# Altium PCB LED灯带-2835-30B-全限流-加定位点.PcbDoc (part 3 of 3)
Units mm, origin at the board's own origin, x right, y up, seen from the top; angles counter-clockwise.
Board outline 500 x 8 mm, 2 copper layers (Top Layer, Bottom Layer); 91 components, 0 nets, 184 pads, 0 vias.
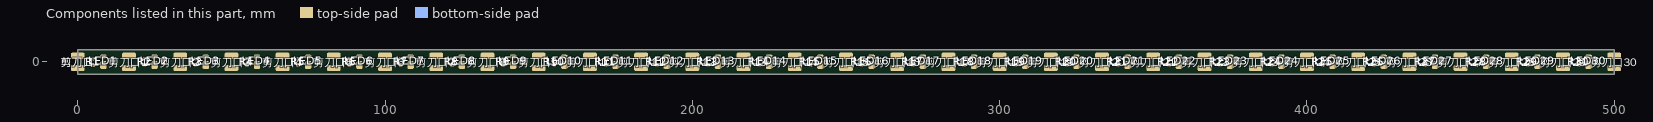
[diagram p3: the components of this part, seen from the top]

## Other copper (continued)
Top Layer: (continued)
  rectangle: 338.794,0.381 339.683,1.524
  rectangle: 339.122,0.762 339.302,1.778
  rectangle: 339.302,0.762 339.429,1.778
  rectangle: 333.333,0.635 336.762,3.741
  rectangle: 333.333,-3.683 337.651,-0.635
  rectangle: 346.795,-3.683 350.097,-0.635
  rectangle: 347.176,0.635 350.097,3.741
  rectangle: 340.318,-2.286 341.08,0.318
  rectangle: 340.445,-2.413 343.489,0.508
  region: 340.673,1.497 340.318,1.143 340.445,1.016 340.8,1.37
  rectangle: 340.445,1.016 343.747,2.286
  rectangle: 340.43,1.031 343.493,2.921
  region: 340.445,-0.762 340.953,-0.254 339.556,1.143 339.048,0.635
  rectangle: 337.524,0.508 338.006,1.651
  region: 337.783,1.392 337.91,1.519 337.651,1.778 337.524,1.651
  region: 338.006,0.989 337.524,0.508 337.651,0.381 338.133,0.862
  region: 337.556,-0.994 337.91,-0.64 337.651,-0.381 337.297,-0.735
  rectangle: 337.651,0.508 339.302,1.778
  rectangle: 337.651,0.381 339.122,0.762
  rectangle: 337.651,-3.048 339.175,-0.381
  region: 357.344,2.064 356.99,2.418 356.731,2.159 357.085,1.805
  rectangle: 356.985,1.143 357.366,2.54
  rectangle: 353.048,0.889 353.683,2.667
  region: 356.255,-3.153 356.609,-2.799 356.35,-2.54 355.996,-2.894
  rectangle: 355.842,-3.048 360.827,-2.767
  rectangle: 360.922,-3.175 361.557,-0.889
  region: 360.827,-3.026 361.181,-2.672 360.922,-2.413 360.568,-2.767
  rectangle: 350.259,-3.683 361.303,-2.794
  rectangle: 361.181,-3.683 366.764,-0.63
  region: 361.535,-0.984 361.181,-0.63 360.922,-0.889 361.276,-1.243
  region: 355.996,-1.243 356.35,-0.889 355.842,-0.381 355.488,-0.735
  region: 354.223,-0.994 354.577,-0.64 354.318,-0.381 353.964,-0.735
  rectangle: 350.259,-3.683 356.35,-0.889
  region: 353.329,2.386 353.683,2.032 353.942,2.291 353.588,2.645
  region: 360.097,1.333 360.795,0.635 361.054,0.894 360.355,1.592
  region: 353.07,0.984 353.424,0.63 353.683,0.889 353.329,1.243
  rectangle: 357.112,1.016 360.795,3.741
  rectangle: 360.795,0.635 366.637,3.741
  rectangle: 350.259,2.159 366.637,3.741
  rectangle: 350.259,0.635 353.429,3.741
  rectangle: 360.033,-2.159 360.414,0.249
  region: 359.806,-2.059 360.16,-2.413 360.419,-2.154 360.065,-1.8
  region: 360.065,-0.105 360.419,0.249 360.16,0.508 359.806,0.154
  region: 357.339,-1.932 356.985,-2.286 357.112,-2.413 357.466,-2.059
  rectangle: 356.604,-0.254 358.001,0.508
  region: 356.001,1.165 356.355,1.519 356.096,1.778 355.742,1.424
  rectangle: 355.461,0.381 356.35,1.524
  rectangle: 355.789,0.762 355.969,1.778
  rectangle: 355.969,0.762 356.096,1.778
  rectangle: 350,0.635 353.429,3.741
  rectangle: 350,-3.683 354.318,-0.635
  rectangle: 363.462,-3.683 366.764,-0.635
  rectangle: 363.843,0.635 366.764,3.741
  rectangle: 356.985,-2.286 357.747,0.318
  rectangle: 357.112,-2.413 360.155,0.508
  region: 357.339,1.497 356.985,1.143 357.112,1.016 357.466,1.37
  rectangle: 357.112,1.016 360.414,2.286
  rectangle: 357.097,1.031 360.16,2.921
  region: 357.112,-0.762 357.62,-0.254 356.223,1.143 355.715,0.635
  rectangle: 354.191,0.508 354.672,1.651
  region: 354.45,1.392 354.577,1.519 354.318,1.778 354.191,1.651
  region: 354.672,0.989 354.191,0.508 354.318,0.381 354.799,0.862
  region: 354.223,-0.994 354.577,-0.64 354.318,-0.381 353.964,-0.735
  rectangle: 354.318,0.508 355.969,1.778
  rectangle: 354.318,0.381 355.789,0.762
  rectangle: 354.318,-3.048 355.842,-0.381
  region: 374.011,2.064 373.657,2.418 373.398,2.159 373.752,1.805
  rectangle: 373.652,1.143 374.033,2.54
  rectangle: 369.715,0.889 370.35,2.667
  region: 372.921,-3.153 373.276,-2.799 373.017,-2.54 372.663,-2.894
  rectangle: 372.509,-3.048 377.493,-2.767
  rectangle: 377.589,-3.175 378.224,-0.889
  region: 377.493,-3.026 377.848,-2.672 377.589,-2.413 377.235,-2.767
  rectangle: 366.926,-3.683 377.97,-2.794
  rectangle: 377.848,-3.683 383.431,-0.63
  region: 378.202,-0.984 377.848,-0.63 377.589,-0.889 377.943,-1.243
  region: 372.663,-1.243 373.017,-0.889 372.509,-0.381 372.155,-0.735
  region: 370.889,-0.994 371.244,-0.64 370.985,-0.381 370.631,-0.735
  rectangle: 366.926,-3.683 373.017,-0.889
  region: 369.996,2.386 370.35,2.032 370.609,2.291 370.254,2.645
  region: 376.763,1.333 377.462,0.635 377.721,0.894 377.022,1.592
  region: 369.737,0.984 370.091,0.63 370.35,0.889 369.996,1.243
  rectangle: 373.779,1.016 377.462,3.741
  rectangle: 377.462,0.635 383.304,3.741
  rectangle: 366.926,2.159 383.304,3.741
  rectangle: 366.926,0.635 370.096,3.741
  rectangle: 376.7,-2.159 377.081,0.249
  region: 376.473,-2.059 376.827,-2.413 377.086,-2.154 376.731,-1.8
  region: 376.731,-0.105 377.086,0.249 376.827,0.508 376.473,0.154
  region: 374.006,-1.932 373.652,-2.286 373.779,-2.413 374.133,-2.059
  rectangle: 373.271,-0.254 374.668,0.508
  region: 372.667,1.165 373.022,1.519 372.763,1.778 372.409,1.424
  rectangle: 372.128,0.381 373.017,1.524
  rectangle: 372.456,0.762 372.636,1.778
  rectangle: 372.636,0.762 372.763,1.778
  rectangle: 366.667,0.635 370.096,3.741
  rectangle: 366.667,-3.683 370.985,-0.635
  rectangle: 380.129,-3.683 383.431,-0.635
  rectangle: 380.51,0.635 383.431,3.741
  rectangle: 373.652,-2.286 374.414,0.318
  rectangle: 373.779,-2.413 376.822,0.508
  region: 374.006,1.497 373.652,1.143 373.779,1.016 374.133,1.37
  rectangle: 373.779,1.016 377.081,2.286
  rectangle: 373.763,1.031 376.827,2.921
  region: 373.779,-0.762 374.287,-0.254 372.89,1.143 372.382,0.635
  rectangle: 370.858,0.508 371.339,1.651
  region: 371.117,1.392 371.244,1.519 370.985,1.778 370.858,1.651
  region: 371.339,0.989 370.858,0.508 370.985,0.381 371.466,0.862
  region: 370.889,-0.994 371.244,-0.64 370.985,-0.381 370.631,-0.735
  rectangle: 370.985,0.508 372.636,1.778
  rectangle: 370.985,0.381 372.456,0.762
  rectangle: 370.985,-3.048 372.509,-0.381
  region: 390.677,2.064 390.323,2.418 390.064,2.159 390.419,1.805
  rectangle: 390.318,1.143 390.699,2.54
  rectangle: 386.381,0.889 387.016,2.667
  region: 389.588,-3.153 389.942,-2.799 389.683,-2.54 389.329,-2.894
  rectangle: 389.175,-3.048 394.16,-2.767
  rectangle: 394.255,-3.175 394.89,-0.889
  region: 394.16,-3.026 394.514,-2.672 394.255,-2.413 393.901,-2.767
  rectangle: 383.592,-3.683 394.636,-2.794
  rectangle: 394.514,-3.683 400.097,-0.63
  region: 394.868,-0.984 394.514,-0.63 394.255,-0.889 394.61,-1.243
  region: 389.329,-1.243 389.683,-0.889 389.175,-0.381 388.821,-0.735
  region: 387.556,-0.994 387.91,-0.64 387.651,-0.381 387.297,-0.735
  rectangle: 383.592,-3.683 389.683,-0.889
  region: 386.662,2.386 387.016,2.032 387.275,2.291 386.921,2.645
  region: 393.43,1.333 394.128,0.635 394.387,0.894 393.689,1.592
  region: 386.403,0.984 386.758,0.63 387.016,0.889 386.662,1.243
  rectangle: 390.445,1.016 394.128,3.741
  rectangle: 394.128,0.635 399.97,3.741
  rectangle: 383.592,2.159 399.97,3.741
  rectangle: 383.592,0.635 386.762,3.741
  rectangle: 393.366,-2.159 393.747,0.249
  region: 393.139,-2.059 393.493,-2.413 393.752,-2.154 393.398,-1.8
  region: 393.398,-0.105 393.752,0.249 393.493,0.508 393.139,0.154
  region: 390.673,-1.932 390.318,-2.286 390.445,-2.413 390.8,-2.059
  rectangle: 389.937,-0.254 391.334,0.508
  region: 389.334,1.165 389.688,1.519 389.429,1.778 389.075,1.424
  rectangle: 388.794,0.381 389.683,1.524
  rectangle: 389.122,0.762 389.302,1.778
  rectangle: 389.302,0.762 389.429,1.778
  rectangle: 383.333,0.635 386.762,3.741
  rectangle: 383.333,-3.683 387.651,-0.635
  rectangle: 396.795,-3.683 400.097,-0.635
  rectangle: 397.176,0.635 400.097,3.741
  rectangle: 390.318,-2.286 391.08,0.318
  rectangle: 390.445,-2.413 393.489,0.508
  region: 390.673,1.497 390.318,1.143 390.445,1.016 390.8,1.37
  rectangle: 390.445,1.016 393.747,2.286
  rectangle: 390.43,1.031 393.493,2.921
  region: 390.445,-0.762 390.953,-0.254 389.556,1.143 389.048,0.635
  rectangle: 387.524,0.508 388.006,1.651
  region: 387.783,1.392 387.91,1.519 387.651,1.778 387.524,1.651
  region: 388.006,0.989 387.524,0.508 387.651,0.381 388.133,0.862
  region: 387.556,-0.994 387.91,-0.64 387.651,-0.381 387.297,-0.735
  rectangle: 387.651,0.508 389.302,1.778
  rectangle: 387.651,0.381 389.122,0.762
  rectangle: 387.651,-3.048 389.175,-0.381
  region: 407.344,2.064 406.99,2.418 406.731,2.159 407.085,1.805
  rectangle: 406.985,1.143 407.366,2.54
  rectangle: 403.048,0.889 403.683,2.667
  region: 406.255,-3.153 406.609,-2.799 406.35,-2.54 405.996,-2.894
  rectangle: 405.842,-3.048 410.827,-2.767
  rectangle: 410.922,-3.175 411.557,-0.889
  region: 410.827,-3.026 411.181,-2.672 410.922,-2.413 410.568,-2.767
  rectangle: 400.259,-3.683 411.303,-2.794
  rectangle: 411.181,-3.683 416.764,-0.63
  region: 411.535,-0.984 411.181,-0.63 410.922,-0.889 411.276,-1.243
  region: 405.996,-1.243 406.35,-0.889 405.842,-0.381 405.488,-0.735
  region: 404.223,-0.994 404.577,-0.64 404.318,-0.381 403.964,-0.735
  rectangle: 400.259,-3.683 406.35,-0.889
  region: 403.329,2.386 403.683,2.032 403.942,2.291 403.588,2.645
  region: 410.097,1.333 410.795,0.635 411.054,0.894 410.355,1.592
  region: 403.07,0.984 403.424,0.63 403.683,0.889 403.329,1.243
  rectangle: 407.112,1.016 410.795,3.741
  rectangle: 410.795,0.635 416.637,3.741
  rectangle: 400.259,2.159 416.637,3.741
  rectangle: 400.259,0.635 403.429,3.741
  rectangle: 410.033,-2.159 410.414,0.249
  region: 409.806,-2.059 410.16,-2.413 410.419,-2.154 410.065,-1.8
  region: 410.065,-0.105 410.419,0.249 410.16,0.508 409.806,0.154
  region: 407.339,-1.932 406.985,-2.286 407.112,-2.413 407.466,-2.059
  rectangle: 406.604,-0.254 408.001,0.508
  region: 406.001,1.165 406.355,1.519 406.096,1.778 405.742,1.424
  rectangle: 405.461,0.381 406.35,1.524
  rectangle: 405.789,0.762 405.969,1.778
  rectangle: 405.969,0.762 406.096,1.778
  rectangle: 400,0.635 403.429,3.741
  rectangle: 400,-3.683 404.318,-0.635
  rectangle: 413.462,-3.683 416.764,-0.635
  rectangle: 413.843,0.635 416.764,3.741
  rectangle: 406.985,-2.286 407.747,0.318
  rectangle: 407.112,-2.413 410.155,0.508
  region: 407.339,1.497 406.985,1.143 407.112,1.016 407.466,1.37
  rectangle: 407.112,1.016 410.414,2.286
  rectangle: 407.097,1.031 410.16,2.921
  region: 407.112,-0.762 407.62,-0.254 406.223,1.143 405.715,0.635
  rectangle: 404.191,0.508 404.672,1.651
  region: 404.45,1.392 404.577,1.519 404.318,1.778 404.191,1.651
  region: 404.672,0.989 404.191,0.508 404.318,0.381 404.799,0.862
  region: 404.223,-0.994 404.577,-0.64 404.318,-0.381 403.964,-0.735
  rectangle: 404.318,0.508 405.969,1.778
  rectangle: 404.318,0.381 405.789,0.762
  rectangle: 404.318,-3.048 405.842,-0.381
  region: 424.011,2.064 423.657,2.418 423.398,2.159 423.752,1.805
  rectangle: 423.652,1.143 424.033,2.54
  rectangle: 419.715,0.889 420.35,2.667
  region: 422.921,-3.153 423.276,-2.799 423.017,-2.54 422.663,-2.894
  rectangle: 422.509,-3.048 427.493,-2.767
  rectangle: 427.589,-3.175 428.224,-0.889
  region: 427.493,-3.026 427.848,-2.672 427.589,-2.413 427.235,-2.767
  rectangle: 416.926,-3.683 427.97,-2.794
  rectangle: 427.848,-3.683 433.431,-0.63
  region: 428.202,-0.984 427.848,-0.63 427.589,-0.889 427.943,-1.243
  region: 422.663,-1.243 423.017,-0.889 422.509,-0.381 422.155,-0.735
  region: 420.889,-0.994 421.244,-0.64 420.985,-0.381 420.631,-0.735
  rectangle: 416.926,-3.683 423.017,-0.889
  region: 419.996,2.386 420.35,2.032 420.609,2.291 420.254,2.645
  region: 426.763,1.333 427.462,0.635 427.721,0.894 427.022,1.592
  region: 419.737,0.984 420.091,0.63 420.35,0.889 419.996,1.243
  rectangle: 423.779,1.016 427.462,3.741
  rectangle: 427.462,0.635 433.304,3.741
  rectangle: 416.926,2.159 433.304,3.741
  rectangle: 416.926,0.635 420.096,3.741
  rectangle: 426.7,-2.159 427.081,0.249
  region: 426.473,-2.059 426.827,-2.413 427.086,-2.154 426.731,-1.8
  region: 426.731,-0.105 427.086,0.249 426.827,0.508 426.473,0.154
  region: 424.006,-1.932 423.652,-2.286 423.779,-2.413 424.133,-2.059
  rectangle: 423.271,-0.254 424.668,0.508
  region: 422.667,1.165 423.022,1.519 422.763,1.778 422.409,1.424
  rectangle: 422.128,0.381 423.017,1.524
  rectangle: 422.456,0.762 422.636,1.778
  rectangle: 422.636,0.762 422.763,1.778
  rectangle: 416.667,0.635 420.096,3.741
  rectangle: 416.667,-3.683 420.985,-0.635
  rectangle: 430.129,-3.683 433.431,-0.635
  rectangle: 430.51,0.635 433.431,3.741
  rectangle: 423.652,-2.286 424.414,0.318
  rectangle: 423.779,-2.413 426.822,0.508
  region: 424.006,1.497 423.652,1.143 423.779,1.016 424.133,1.37
  rectangle: 423.779,1.016 427.081,2.286
  rectangle: 423.763,1.031 426.827,2.921
  region: 423.779,-0.762 424.287,-0.254 422.89,1.143 422.382,0.635
  rectangle: 420.858,0.508 421.339,1.651
  region: 421.117,1.392 421.244,1.519 420.985,1.778 420.858,1.651
  region: 421.339,0.989 420.858,0.508 420.985,0.381 421.466,0.862
  region: 420.889,-0.994 421.244,-0.64 420.985,-0.381 420.631,-0.735
  rectangle: 420.985,0.508 422.636,1.778
  rectangle: 420.985,0.381 422.456,0.762
  rectangle: 420.985,-3.048 422.509,-0.381
  region: 440.677,2.064 440.323,2.418 440.064,2.159 440.419,1.805
  rectangle: 440.318,1.143 440.699,2.54
  rectangle: 436.381,0.889 437.016,2.667
  region: 439.588,-3.153 439.942,-2.799 439.683,-2.54 439.329,-2.894
  rectangle: 439.175,-3.048 444.16,-2.767
  rectangle: 444.255,-3.175 444.89,-0.889
  region: 444.16,-3.026 444.514,-2.672 444.255,-2.413 443.901,-2.767
  rectangle: 433.592,-3.683 444.636,-2.794
  rectangle: 444.514,-3.683 450.097,-0.63
  region: 444.868,-0.984 444.514,-0.63 444.255,-0.889 444.61,-1.243
  region: 439.329,-1.243 439.683,-0.889 439.175,-0.381 438.821,-0.735
  region: 437.556,-0.994 437.91,-0.64 437.651,-0.381 437.297,-0.735
  rectangle: 433.592,-3.683 439.683,-0.889
  region: 436.662,2.386 437.016,2.032 437.275,2.291 436.921,2.645
  region: 443.43,1.333 444.128,0.635 444.387,0.894 443.689,1.592
  region: 436.403,0.984 436.758,0.63 437.016,0.889 436.662,1.243
  rectangle: 440.445,1.016 444.128,3.741
  rectangle: 444.128,0.635 449.97,3.741
  rectangle: 433.592,2.159 449.97,3.741
  rectangle: 433.592,0.635 436.762,3.741
  rectangle: 443.366,-2.159 443.747,0.249
  region: 443.139,-2.059 443.493,-2.413 443.752,-2.154 443.398,-1.8
  region: 443.398,-0.105 443.752,0.249 443.493,0.508 443.139,0.154
  region: 440.673,-1.932 440.318,-2.286 440.445,-2.413 440.8,-2.059
  rectangle: 439.937,-0.254 441.334,0.508
  region: 439.334,1.165 439.688,1.519 439.429,1.778 439.075,1.424
  rectangle: 438.794,0.381 439.683,1.524
  rectangle: 439.122,0.762 439.302,1.778
  rectangle: 439.302,0.762 439.429,1.778
  rectangle: 433.333,0.635 436.762,3.741
  rectangle: 433.333,-3.683 437.651,-0.635
  rectangle: 446.795,-3.683 450.097,-0.635
  rectangle: 447.176,0.635 450.097,3.741
  rectangle: 440.318,-2.286 441.08,0.318
  rectangle: 440.445,-2.413 443.489,0.508
  region: 440.673,1.497 440.318,1.143 440.445,1.016 440.8,1.37
  rectangle: 440.445,1.016 443.747,2.286
  rectangle: 440.43,1.031 443.493,2.921
  region: 440.445,-0.762 440.953,-0.254 439.556,1.143 439.048,0.635
  rectangle: 437.524,0.508 438.006,1.651
  region: 437.783,1.392 437.91,1.519 437.651,1.778 437.524,1.651
  region: 438.006,0.989 437.524,0.508 437.651,0.381 438.133,0.862
  region: 437.556,-0.994 437.91,-0.64 437.651,-0.381 437.297,-0.735
  rectangle: 437.651,0.508 439.302,1.778
  rectangle: 437.651,0.381 439.122,0.762
  rectangle: 437.651,-3.048 439.175,-0.381
  region: 457.344,2.064 456.99,2.418 456.731,2.159 457.085,1.805
  rectangle: 456.985,1.143 457.366,2.54
  rectangle: 453.048,0.889 453.683,2.667
  region: 456.255,-3.153 456.609,-2.799 456.35,-2.54 455.996,-2.894
  rectangle: 455.842,-3.048 460.827,-2.767
  rectangle: 460.922,-3.175 461.557,-0.889
  region: 460.827,-3.026 461.181,-2.672 460.922,-2.413 460.568,-2.767
  rectangle: 450.259,-3.683 461.303,-2.794
  rectangle: 461.181,-3.683 466.764,-0.63
  region: 461.535,-0.984 461.181,-0.63 460.922,-0.889 461.276,-1.243
  region: 455.996,-1.243 456.35,-0.889 455.842,-0.381 455.488,-0.735
  region: 454.223,-0.994 454.577,-0.64 454.318,-0.381 453.964,-0.735
  rectangle: 450.259,-3.683 456.35,-0.889
  region: 453.329,2.386 453.683,2.032 453.942,2.291 453.588,2.645
  region: 460.097,1.333 460.795,0.635 461.054,0.894 460.355,1.592
  region: 453.07,0.984 453.424,0.63 453.683,0.889 453.329,1.243
  rectangle: 457.112,1.016 460.795,3.741
  rectangle: 460.795,0.635 466.637,3.741
  rectangle: 450.259,2.159 466.637,3.741
  rectangle: 450.259,0.635 453.429,3.741
  rectangle: 460.033,-2.159 460.414,0.249
  region: 459.806,-2.059 460.16,-2.413 460.419,-2.154 460.065,-1.8
  region: 460.065,-0.105 460.419,0.249 460.16,0.508 459.806,0.154
  region: 457.339,-1.932 456.985,-2.286 457.112,-2.413 457.466,-2.059
  rectangle: 456.604,-0.254 458.001,0.508
  region: 456.001,1.165 456.355,1.519 456.096,1.778 455.742,1.424
  rectangle: 455.461,0.381 456.35,1.524
  rectangle: 455.789,0.762 455.969,1.778
  rectangle: 455.969,0.762 456.096,1.778
  rectangle: 450,0.635 453.429,3.741
  rectangle: 450,-3.683 454.318,-0.635
  rectangle: 463.462,-3.683 466.764,-0.635
  rectangle: 463.843,0.635 466.764,3.741
  rectangle: 456.985,-2.286 457.747,0.318
  rectangle: 457.112,-2.413 460.155,0.508
  region: 457.339,1.497 456.985,1.143 457.112,1.016 457.466,1.37
  rectangle: 457.112,1.016 460.414,2.286
  rectangle: 457.097,1.031 460.16,2.921
  region: 457.112,-0.762 457.62,-0.254 456.223,1.143 455.715,0.635
  rectangle: 454.191,0.508 454.672,1.651
  region: 454.45,1.392 454.577,1.519 454.318,1.778 454.191,1.651
  region: 454.672,0.989 454.191,0.508 454.318,0.381 454.799,0.862
  region: 454.223,-0.994 454.577,-0.64 454.318,-0.381 453.964,-0.735
  rectangle: 454.318,0.508 455.969,1.778
  rectangle: 454.318,0.381 455.789,0.762
  rectangle: 454.318,-3.048 455.842,-0.381
  region: 474.011,2.064 473.657,2.418 473.398,2.159 473.752,1.805
  rectangle: 473.652,1.143 474.033,2.54
  rectangle: 469.715,0.889 470.35,2.667
  region: 472.921,-3.153 473.276,-2.799 473.017,-2.54 472.663,-2.894
  rectangle: 472.509,-3.048 477.493,-2.767
  rectangle: 477.589,-3.175 478.224,-0.889
  region: 477.493,-3.026 477.848,-2.672 477.589,-2.413 477.235,-2.767
  rectangle: 466.926,-3.683 477.97,-2.794
  rectangle: 477.848,-3.683 483.431,-0.63
  region: 478.202,-0.984 477.848,-0.63 477.589,-0.889 477.943,-1.243
  region: 472.663,-1.243 473.017,-0.889 472.509,-0.381 472.155,-0.735
  region: 470.889,-0.994 471.244,-0.64 470.985,-0.381 470.631,-0.735
  rectangle: 466.926,-3.683 473.017,-0.889
  region: 469.996,2.386 470.35,2.032 470.609,2.291 470.254,2.645
  region: 469.737,0.984 470.091,0.63 470.35,0.889 469.996,1.243
  rectangle: 473.779,1.016 477.393,3.741
  rectangle: 480.187,0.635 483.304,3.741
  rectangle: 466.926,2.159 478.028,3.741
  rectangle: 466.926,0.635 470.096,3.741
  rectangle: 476.7,-2.159 477.081,0.249
  region: 476.473,-2.059 476.827,-2.413 477.086,-2.154 476.731,-1.8
  region: 476.731,-0.105 477.086,0.249 476.827,0.508 476.473,0.154
  region: 474.006,-1.932 473.652,-2.286 473.779,-2.413 474.133,-2.059
  rectangle: 473.271,-0.254 474.668,0.508
  region: 472.667,1.165 473.022,1.519 472.763,1.778 472.409,1.424
  rectangle: 472.128,0.381 473.017,1.524
  rectangle: 472.456,0.762 472.636,1.778
  rectangle: 472.636,0.762 472.763,1.778
  rectangle: 466.667,0.635 470.096,3.741
  rectangle: 466.667,-3.683 470.985,-0.635
  rectangle: 480.129,-3.683 483.431,-0.635
  rectangle: 480.51,0.635 483.431,3.741
  rectangle: 473.652,-2.286 474.414,0.318
  rectangle: 473.779,-2.413 476.822,0.508
  region: 474.006,1.497 473.652,1.143 473.779,1.016 474.133,1.37
  rectangle: 473.779,1.016 477.081,2.286
  rectangle: 473.763,1.031 476.827,2.921
  region: 473.779,-0.762 474.287,-0.254 472.89,1.143 472.382,0.635
  rectangle: 470.858,0.508 471.339,1.651
  region: 471.117,1.392 471.244,1.519 470.985,1.778 470.858,1.651
  region: 471.339,0.989 470.858,0.508 470.985,0.381 471.466,0.862
  region: 470.889,-0.994 471.244,-0.64 470.985,-0.381 470.631,-0.735
  rectangle: 470.985,0.508 472.636,1.778
  rectangle: 470.985,0.381 472.456,0.762
  rectangle: 470.985,-3.048 472.509,-0.381
  region: 490.677,2.064 490.323,2.418 490.064,2.159 490.419,1.805
  rectangle: 490.318,1.143 490.699,2.54
  rectangle: 486.381,0.889 487.016,2.667
  region: 489.588,-3.153 489.942,-2.799 489.683,-2.54 489.329,-2.894
  rectangle: 489.175,-3.048 494.16,-2.767
  rectangle: 494.255,-3.175 494.89,-0.889
  region: 494.16,-3.026 494.514,-2.672 494.255,-2.413 493.901,-2.767
  rectangle: 483.592,-3.683 494.636,-2.794
  rectangle: 494.514,-3.683 500.097,-0.63
  region: 494.868,-0.984 494.514,-0.63 494.255,-0.889 494.61,-1.243
  region: 489.329,-1.243 489.683,-0.889 489.175,-0.381 488.821,-0.735
  region: 487.556,-0.994 487.91,-0.64 487.651,-0.381 487.297,-0.735
  rectangle: 483.592,-3.683 489.683,-0.889
  region: 486.662,2.386 487.016,2.032 487.275,2.291 486.921,2.645
  region: 493.43,1.333 494.128,0.635 494.387,0.894 493.689,1.592
  region: 486.403,0.984 486.758,0.63 487.016,0.889 486.662,1.243
  rectangle: 490.445,1.016 494.128,3.741
  rectangle: 494.128,0.635 499.97,3.741
  rectangle: 483.592,2.159 499.97,3.741
  rectangle: 483.592,0.635 486.762,3.741
  rectangle: 493.366,-2.159 493.747,0.249
  region: 493.139,-2.059 493.493,-2.413 493.752,-2.154 493.398,-1.8
  region: 493.398,-0.105 493.752,0.249 493.493,0.508 493.139,0.154
  region: 490.673,-1.932 490.318,-2.286 490.445,-2.413 490.8,-2.059
  rectangle: 489.937,-0.254 491.334,0.508
  region: 489.334,1.165 489.688,1.519 489.429,1.778 489.075,1.424
  rectangle: 488.794,0.381 489.683,1.524
  rectangle: 489.122,0.762 489.302,1.778
  rectangle: 489.302,0.762 489.429,1.778
  rectangle: 483.333,0.635 486.762,3.741
  rectangle: 483.333,-3.683 487.651,-0.635
  rectangle: 496.795,-3.683 500.097,-0.635
  rectangle: 497.176,0.635 500.097,3.741
  rectangle: 490.318,-2.286 491.08,0.318
  rectangle: 490.445,-2.413 493.489,0.508
  region: 490.673,1.497 490.318,1.143 490.445,1.016 490.8,1.37
  rectangle: 490.445,1.016 493.747,2.286
  rectangle: 490.43,1.031 493.493,2.921
  region: 490.445,-0.762 490.953,-0.254 489.556,1.143 489.048,0.635
  rectangle: 487.524,0.508 488.006,1.651
  region: 487.783,1.392 487.91,1.519 487.651,1.778 487.524,1.651
  region: 488.006,0.989 487.524,0.508 487.651,0.381 488.133,0.862
  region: 487.556,-0.994 487.91,-0.64 487.651,-0.381 487.297,-0.735
  rectangle: 487.651,0.508 489.302,1.778
  rectangle: 487.651,0.381 489.122,0.762
  rectangle: 487.651,-3.048 489.175,-0.381
  rectangle: 478.028,2.286 481.965,3.741
  rectangle: 477.139,1.651 477.647,2.54
  rectangle: 479.806,1.778 480.441,2.54

## Silkscreen, mask and mechanical layers (free items; w line width, h text height)
Top Solder:
  text "DC6V" at 496.189,2.032 h2.5 r270
  text "DC6V" at 3.811,-2.032 h2.5 r90